# Allegro board capacitorboard.brd
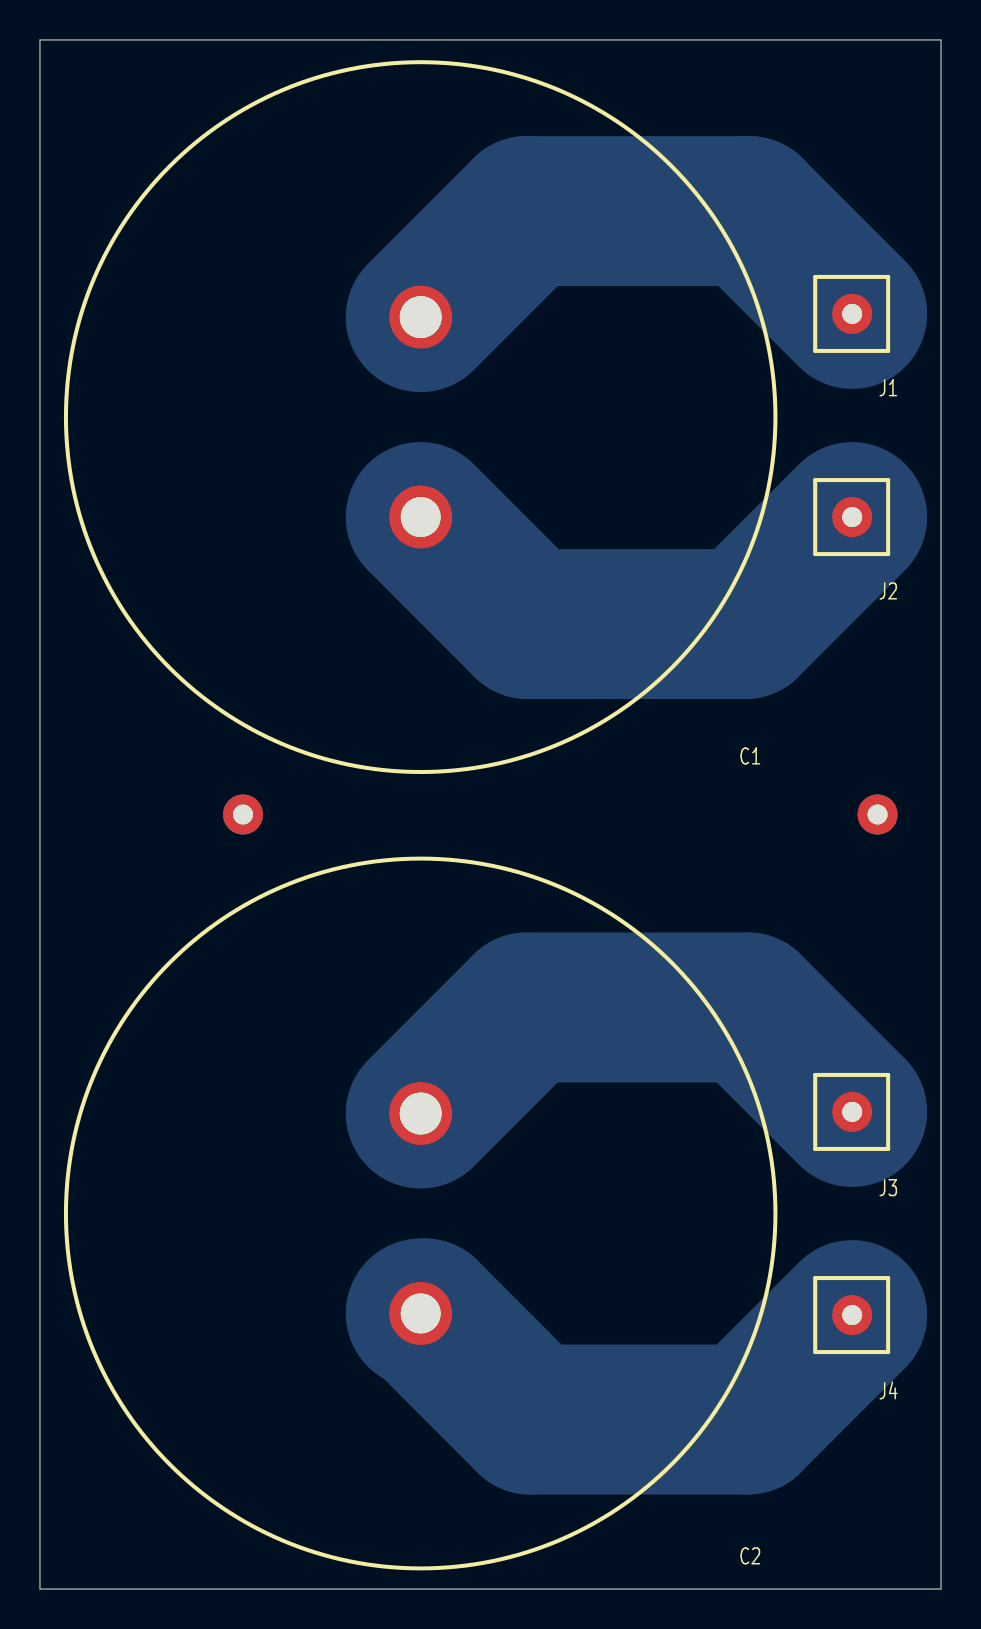
[diagram p0: board, top side]
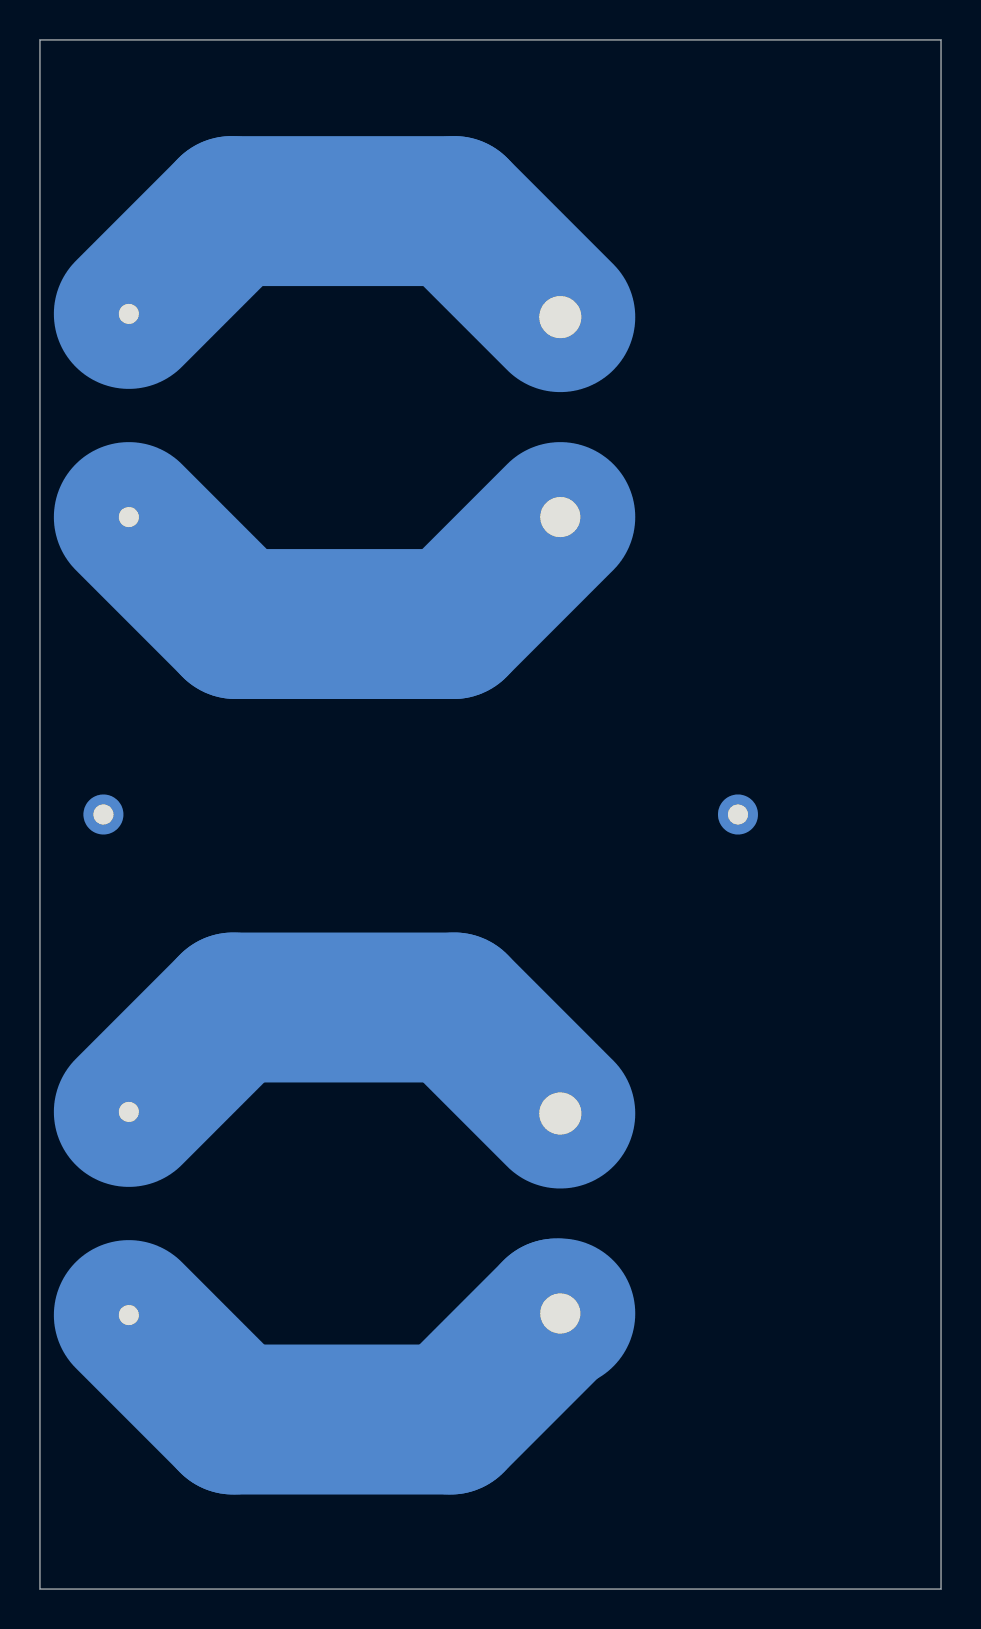
[diagram p1: board, bottom side, seen from below]

Outline 45.09 x 77.47 mm; copper layers: TOP, BOTTOM. Coordinates in mm from the lower left corner of the outline.
Outline path: 0,77.47 0,0 45.09,0 45.09,77.47 0,77.47

## Design rules (mm)
constraint set DEFAULT: min track width 0.127

## Placement (name value [footprint] x y rotation side)
C1  380LX822M063A032  [CAPPRD1000W190D3550H3700]  19.05 53.61 90 top
C2  380LX822M063A032  [CAPPRD1000W190D3550H3700]  19.05 13.78 90 top
J1  -  [009176001873906]  40.64 63.77 0 top
J2  -  [009176001873906]  40.64 53.61 0 top
J3  -  [009176001873906]  40.64 23.86 0 top
J4  -  [009176001873906]  40.64 13.7 0 top
NOREF  -  [unnamed]  41.91 38.73 0 top
NOREF#2  -  [unnamed]  10.16 38.73 0 top

## Library data of the parts
C1 C2 = 380LX822M063A032
J1-J4 = 009176001873906

## Footprints (pads in the part's own frame, mm; a bottom-side part is the same pattern mirrored in y, then rotated)
009176001873906
  round 2 hole 1: 1(0,0)
CAPPRD1000W190D3550H3700
  round 3.15 hole 2: 1(0,0)
  round 3.15 hole 2.1: 2(10,0)
unnamed
  round 2 hole 1 unplated: (0,0)

## Nets
N00153: C1.2(-) J1.1
N00160: C1.1 J2.1
N00200: C2.2(-) J3.1
N00207: C2.1 J4.1

## Routing (per net, layer and track width the routed paths; a pad name or vN(x,y) marks a point on that pad's centre or on a via; arc(x,y) is an arc through that point)
N00153: length 25.9
  BOTTOM w7.5: C1.2 24.35,68.91 35.5,68.91 J1.1
N00160: length 26
  BOTTOM w7.5: C1.1 24.4,48.26 35.29,48.26 J2.1
N00200: length 26
  BOTTOM w7.5: C2.2 24.35,29.08 35.42,29.08 J3.1
N00207: length 26
  BOTTOM w7.5: C2.1 19.24,13.78 24.54,8.48 35.42,8.48 J4.1
